# EAGLE board rj45-adaptor-1-3 (EAGLE 8.4.3)
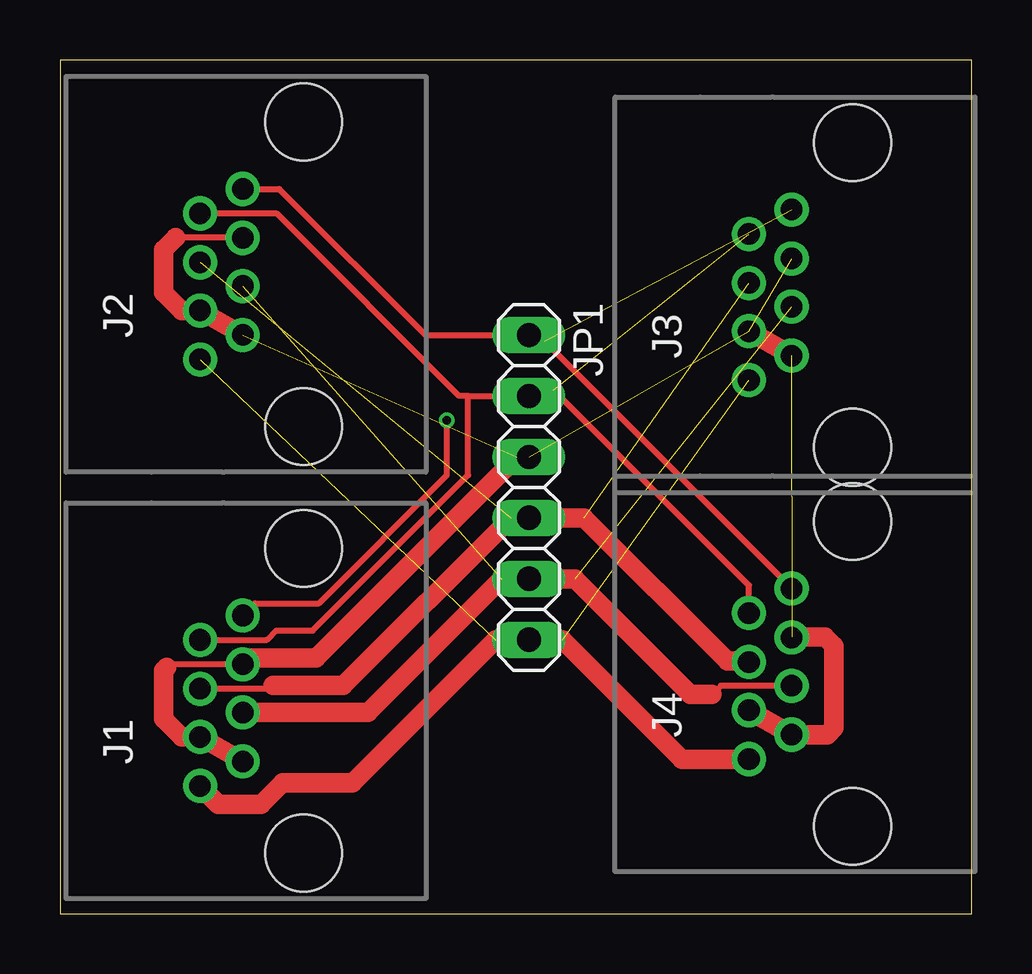
[diagram p0: board, top side]
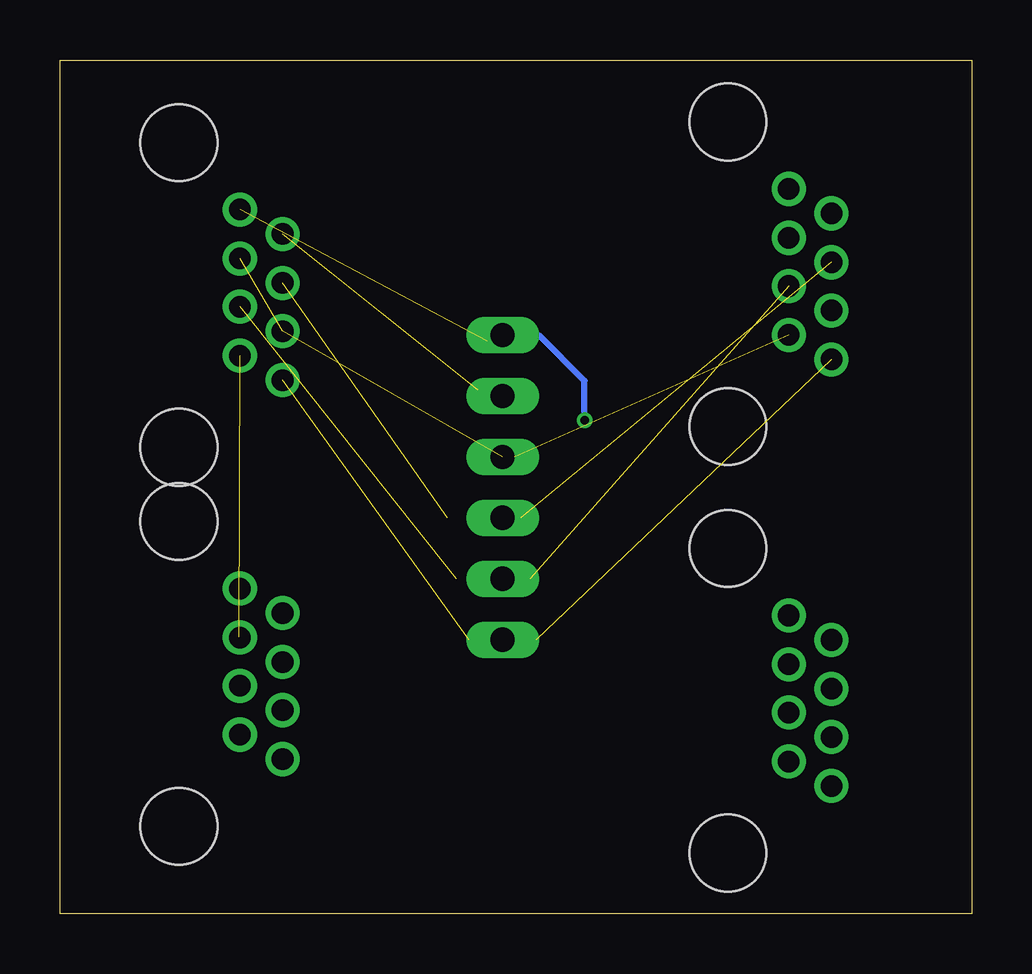
[diagram p1: board, bottom side, seen from below]

Size 38 x 35.6 mm. Coordinates in mm from the lower left corner, seen from the top.
Outline: 0,0 38,0 38,35.6 0,35.6 0,0
Copper layers (1*16): Top 0.035mm / dielectric 1.5mm / Bottom 0.035mm
Design rules "SeeedStudio_2layer_DRU_no_angle_20140221 *": minimum track width 6mil, minimum drill 12mil, track to track 10mil, track to pad 10mil, pad to pad 10mil, via to via 10mil, smd to smd 0mil, copper to edge 10mil, drill to drill 10mil, minimum pad ring 10mil, minimum via ring 6mil, stop-mask expansion 2mil, vias tented up to drill 100mil, thermal gap 10mil

## Footprints (pad centres in the part's own frame; a part is rotated, then mirrored left to right if it is on the bottom)
RJ45-PULSE-E5J88 = drill 0.9 pad 1.422: 1 3.555,2.54; 2 2.535,4.32; 3 1.515,2.54; 4 0.495,4.32; 5 -0.495,2.54; 6 -1.515,4.32; 7 -2.535,2.54; 8 -3.555,4.32 | hole 3.2: 6.35,0; -6.35,0
1X06 = drill 1.016 long: 1 -6.35,0; 2 -3.81,0; 3 -1.27,0; 4 1.27,0; 5 3.81,0; 6 6.35,0

## Placement (x,y rotation side)
J1  RJ45-JACK  [RJ45-PULSE-E5J88]  10.16,8.89 90 top
J2  RJ45-JACK  [RJ45-PULSE-E5J88]  10.16,26.67 90 top
J3  RJ45-JACK  [RJ45-PULSE-E5J88]  33.04,25.81 90 top
J4  RJ45-JACK  [RJ45-PULSE-E5J88]  33.04,10.01 90 top
JP1  [1X06]  19.55,17.78 270 top

## Library data of the parts
J1-J4 = trainlib
JP1 = pinhead

## Nets
ALT1: J1.4 J2.4 J3.4 J4.4 JP1.4
ALT2: J1.5 J2.5 J3.5 J4.5 JP1.5
CANH: J1.1 J2.1 J3.1 J4.1 JP1.1
CANL: J1.2 J2.2 J3.2 J4.2 JP1.2
GND: J1.3 J1.6 J1.7 J2.3 J2.6 J2.7 J3.3 J3.6 J3.7 J4.3 J4.6 J4.7 JP1.3
PWR_POS: J1.8 J2.8 J3.8 J4.8 JP1.6

## Tracks (layer width: path | path; a pad name or v marks a point on that pad's centre or on a via)
ALT1  (2 unrouted)
  Top 0.254: J1.4 5.85,9.4 8.76,9.4 8.89,9.53
  Top 0.813: J4.4 28.68,10.54 27.81,10.54 21.84,16.51 JP1.4 18.8,16.51 11.81,9.53 8.89,9.53
ALT2  (2 unrouted)
  Top 0.254: J4.5 29.13,9.51 27.55,9.51 27.18,9.14
  Top 0.813: J1.5 12.84,8.39 18.41,13.97 JP1.5 21.46,13.97 26.29,9.14 27.18,9.14
CANH  (via drill 0.35)  (1 unrouted)
  Top 0.254: J4.1 20.19,23.88 19.8,23.88 JP1.1 15.24,24.13 9.14,30.23 J2.1 | J1.1 8.13,12.95 10.79,12.95 16.13,18.29 v16.13,20.57
  Bottom 0.254: v16.13,20.57 16.13,22.23 18.03,24.13 JP1.1
CANL  (1 unrouted)
  Top 0.254: J4.2 28.72,13.7 20.57,21.84 20.32,21.59 JP1.2 17.02,21.59 | J2.2 9.02,29.2 16.64,21.59 17.02,21.59 | J1.2 8.63,11.43 9.02,11.81 10.54,11.81 17.02,18.29 17.02,21.59
GND  (4 unrouted)
  Top 0.254: J1.3 4.56,10.4 4.45,10.29 | J2.3 4.83,28.19
  Top 0.813: J1.7 J1.6 5.07,7.38 4.32,8.13 4.32,10.16 4.45,10.29 | J2.7 J2.6 5.07,25.16 4.32,25.91 4.32,27.69 4.83,28.19 | J4.6 J4.7 31.98,7.47 32.26,7.75 32.26,11.18 31.88,11.56 30.53,11.56 J4.3 | J3.6 J3.7 | J1.3 7.88,10.67 10.67,10.67 19.05,19.05 JP1.3
PWR_POS  (2 unrouted)
  Top 0.813: J1.8 6.6,4.57 8.38,4.57 9.27,5.46 12.19,5.46 18.16,11.43 JP1.6 20.95,11.43 25.93,6.45 J4.8